# Altium PCB BPQ.PcbDoc (part 1 of 2)
Units mm, origin at the board's own origin, x right, y up, seen from the top; angles counter-clockwise.
Board outline 200.03 x 149.99 mm, 2 copper layers (Top Layer, Bottom Layer); 132 components, 80 nets, 460 pads, 79 vias.
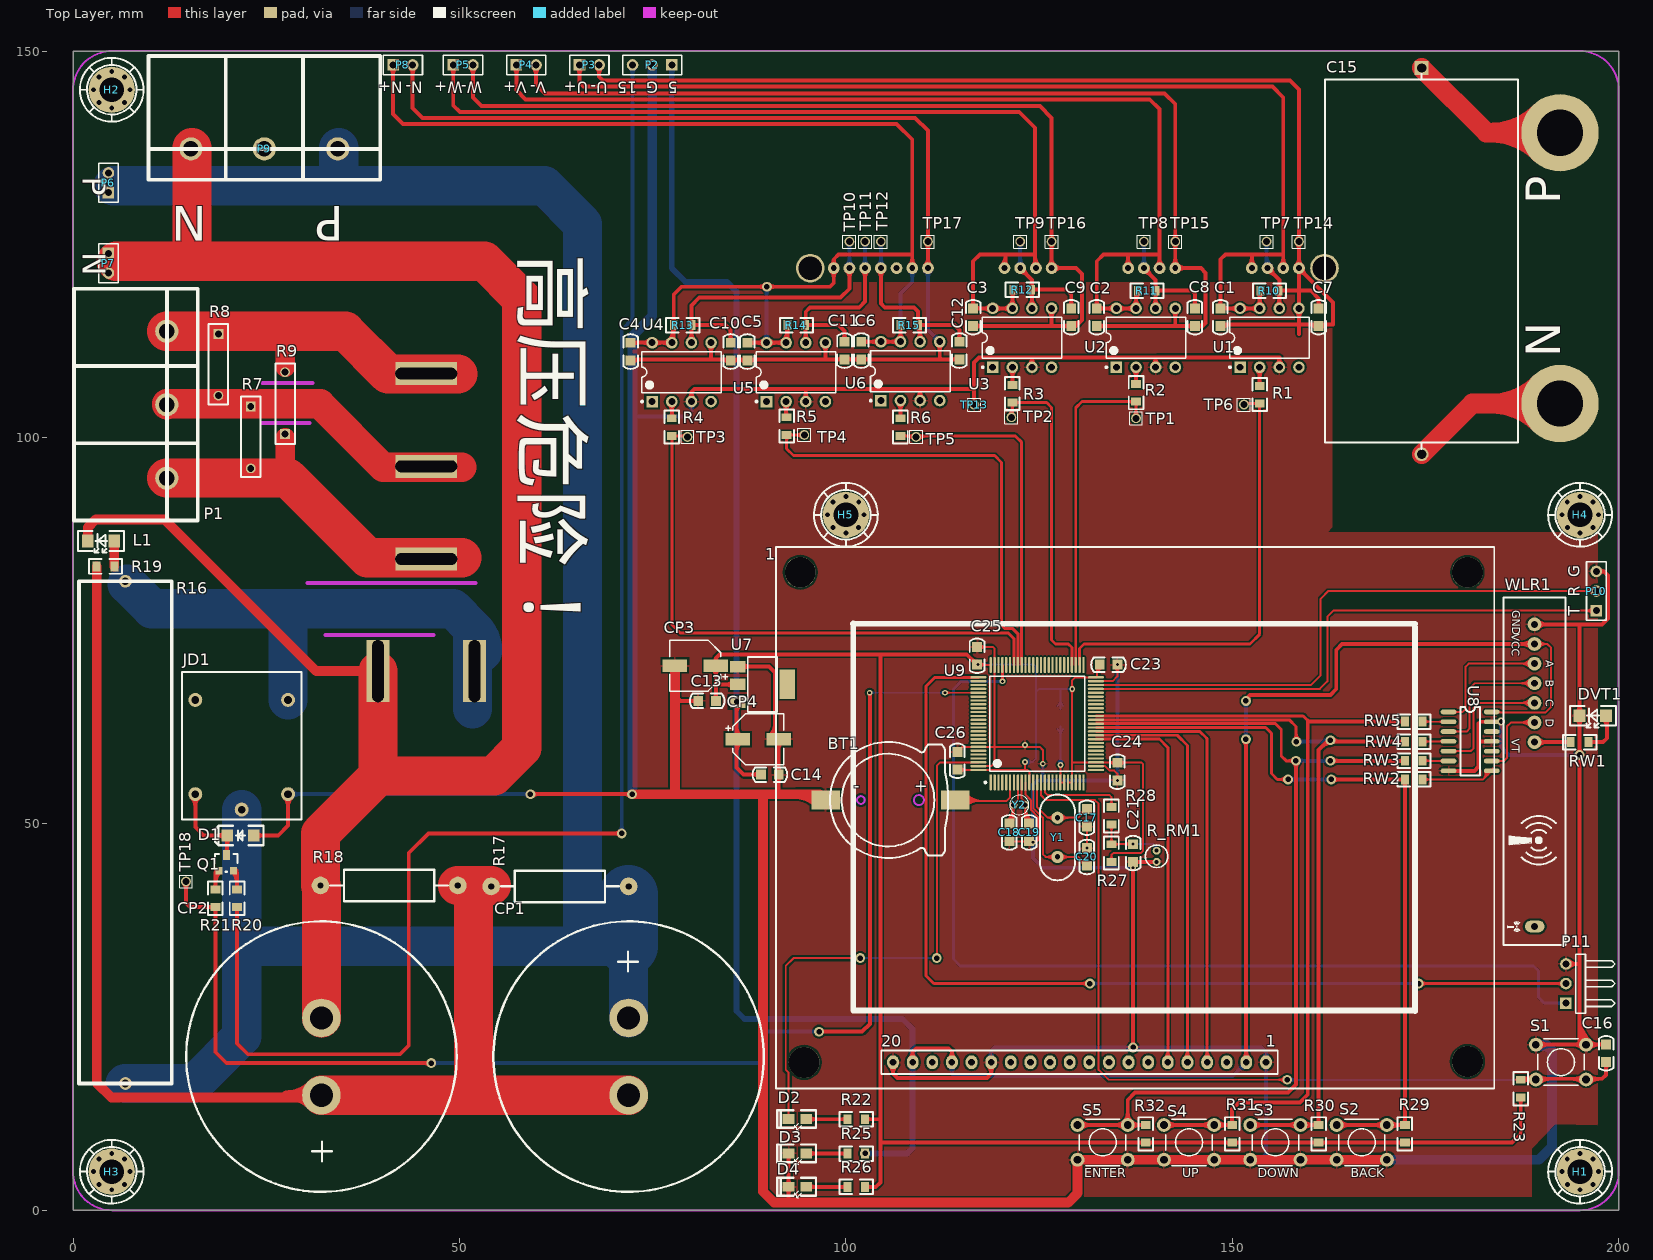
[diagram p0: Top Layer view]
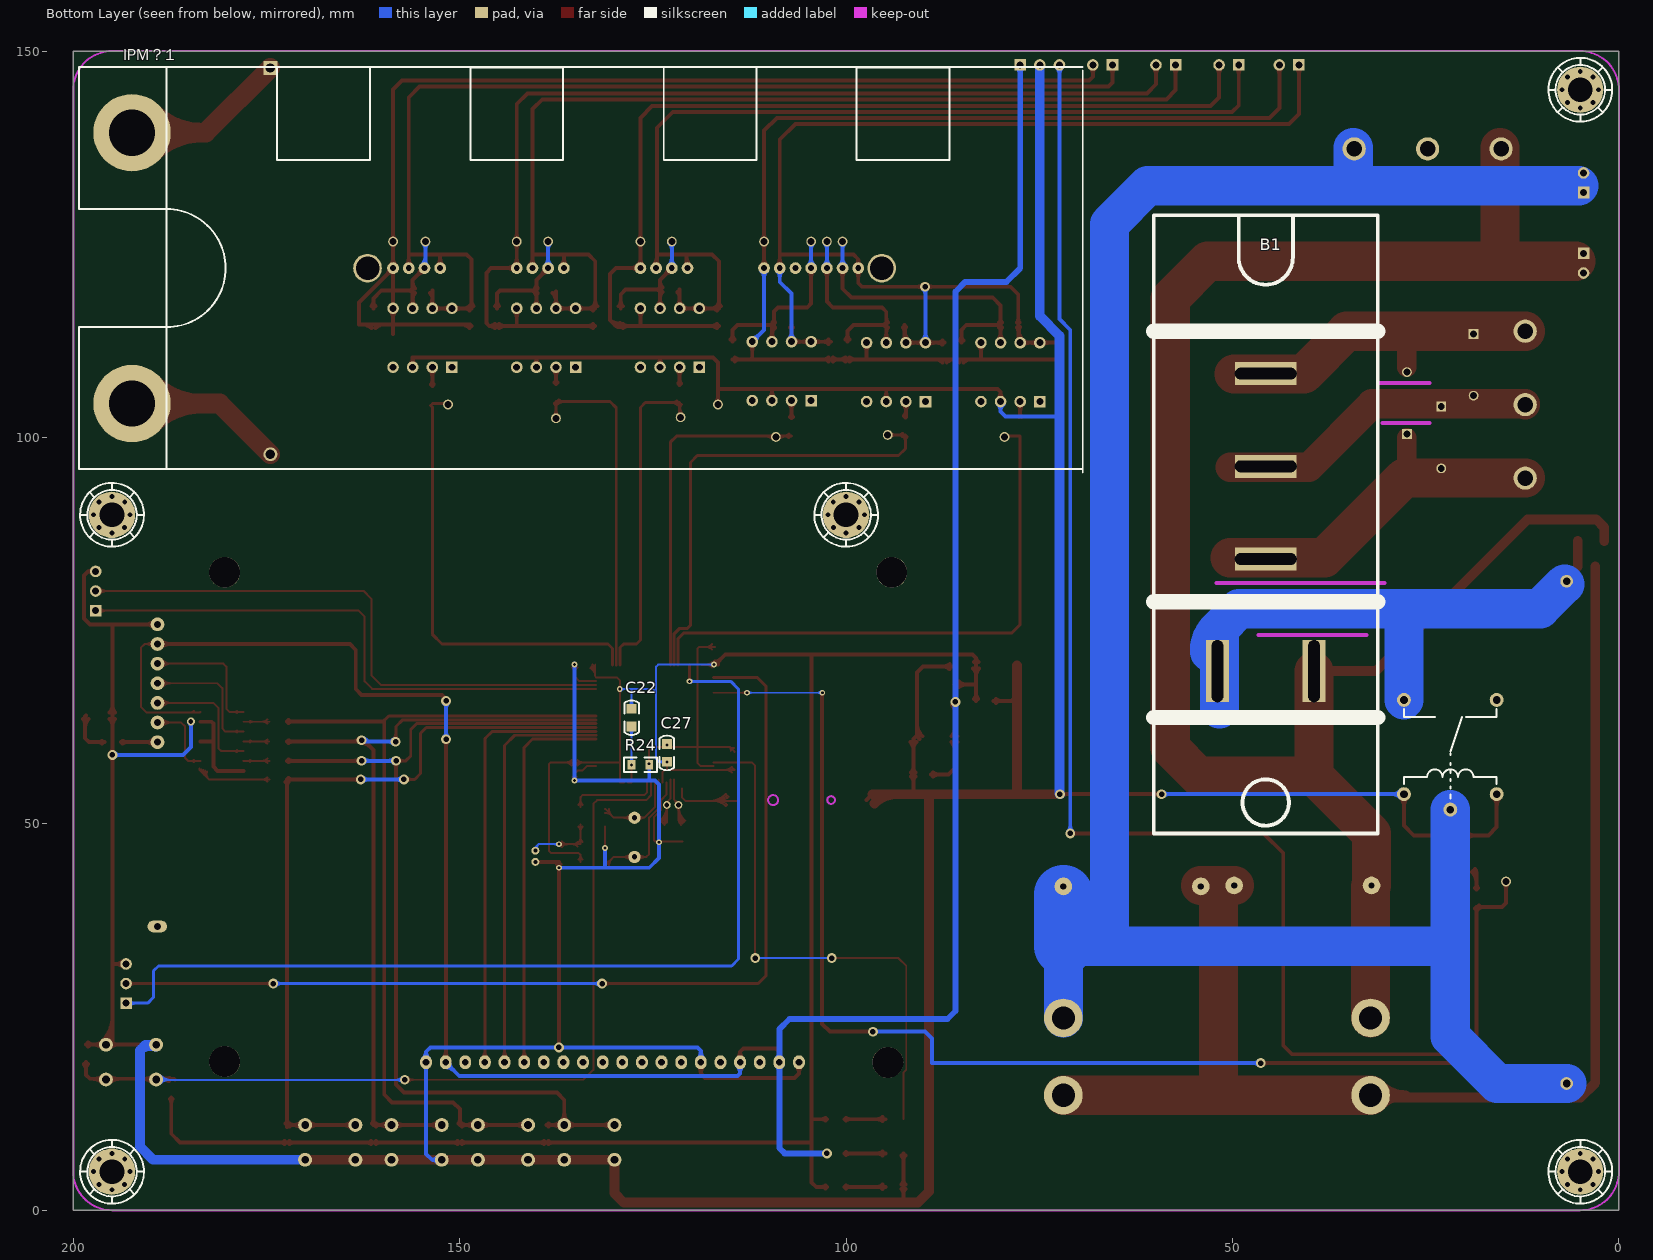
[diagram p1: Bottom Layer view, seen from below]

## Layer stack, top to bottom
Top Layer: signal copper 0.0356
Dielectric: dielectric 0.32, FR-4, Dk 4.8
Bottom Layer: signal copper 0.0356

## Board outline
0,0 200.025,0 200,0.025 200,5.588 200,149.962 200.025,149.987 195.58,149.987 0,149.987

## Design rules (kind name [scope] priority, off if disabled: settings)
Clearance [All] p1: gap=0.254
PolygonConnect [All] p1: connectstyle=Relief reliefconductorwidth=0.254 reliefentries=4 polygonreliefangle="90 Angle" airgapwidth=0.254
RoutingVias [All] p1: holewidth=0.711 width=1.27 viastyle="Through Hole" minholewidth=0.711 minwidth=1.27 maxholewidth=0.711 maxwidth=1.27
SolderMaskExpansion [All] p1: expansion=0.102
Width [All] p1: maxlimit=12.7 minlimit=0.254 preferedwidth=0.508
28 further rules are at their usual default settings.

## Components (designator, comment, footprint, x,y, rotation, side; value= is the part's Value field where it differs from the comment)
1 "12864" YX12864B 90.932,15.748 r0 top
B1 "3BRIDGE" 三相整流桥 60.198,48.768 r180 bottom
BT1 "3.6V" CR1220 114.173,53.086 r180 top
C1 "Cap" 0805C 148.463,114.427 r90 top
C2 "Cap" 0805C 132.461,114.427 r90 top
C3 "Cap" 0805C 116.459,114.427 r90 top
C4 "Cap" 0805C 72.136,109.982 r90 top
C5 "Cap" 0805C 87.249,109.982 r90 top
C6 "Cap" 0805C 101.981,110.109 r90 top
C7 "Cap" 0805C 161.163,114.427 r90 top
C8 "Cap" 0805C 145.161,114.427 r90 top
C9 "Cap" 0805C 129.159,114.427 r90 top
C10 "Cap" 0805C 85.09,109.982 r90 top
C11 "Cap" 0805C 99.822,110.109 r90 top
C12 "Cap" 0805C 114.681,110.109 r90 top
C13 "104" 0805C 80.899,65.913 r0 top
C14 "104" 0805C 91.313,56.388 r180 top
C15 "Cap" Cap_X 174.498,147.828 r270 top
C16 "104" 0805C 198.374,21.463 r270 top
C17 "10p" 0805C 131.191,49.657 r90 top
C18 "10p" 0805C 121.158,47.752 r90 top
C19 "10p" 0805C 123.698,47.752 r90 top
C20 "10p" 0805C 131.191,46.863 r270 top
C21 "104" 0805C 137.16,45.085 r90 top
C22 "104" 0805C 127.762,62.611 r90 bottom
C23 "104" 0805C 132.842,70.612 r0 top
C24 "104" 0805C 135.128,57.912 r270 top
C25 "104" 0805C 116.967,70.612 r90 top
C26 "104" 0805C 114.427,57.023 r90 top
C27 "104" 0805C 123.19,58.039 r90 bottom
CP1 "470uF/450V" CAP_35X50 71.882,24.892 r270 top
CP2 "470uF/450V" CAP_35X50 32.131,14.892 r90 top
CP3 "47uF/25V" CAP_6.3X5.4 80.518,70.485 r180 top
CP4 "10uF" CAP_6.3X5.4 88.646,60.96 r0 top
D1 "1N4148" Diode_1206 23.368,48.514 r0 top
D2 "LED" LED_0805 94.869,11.811 r180 top
D3 "LED" LED_0805 94.869,7.366 r180 top
D4 "LED" LED_0805 94.869,3.048 r180 top
DVT1 "LED" LED_1206 198.374,64.008 r180 top
H1 "铜柱孔" HOLE 195,5 r0 top
H2 "铜柱孔" HOLE 5,145 r0 top
H3 "铜柱孔" HOLE 5,5 r0 top
H4 "铜柱孔" HOLE 195,90 r0 top
H5 "铜柱孔" HOLE 100,90 r0 top (schematic designator H4)
IPM？1 "PM25RLA120" PM25RLA120 158.623,121.92 r180 bottom
JD1 "SRD-12VDC-SL-C" SRD-12VDC-SL-C 27.813,53.848 r90 top
L1 "LED" LED_1206 5.334,86.614 r180 top
P1 "三相电接入口" 30A/300V 0.127,119.253 r270 top
P2 "Header 3" HDR1X3 77.47,148.209 r180 top
P3 "Header 2" HDR1X2 65.532,148.209 r0 top
P4 "Header 2" HDR1X2 57.362,148.209 r0 top
P5 "Header 2" HDR1X2 49.191,148.209 r0 top
P6 "Header 2" HDR1X2 4.572,131.699 r90 top
P7 "Header 2" HDR1X2 4.572,123.825 r270 top
P8 "Header 2" HDR1X2 41.402,148.209 r0 top
P9 "PN输出口" 30A/300V 39.751,149.352 r180 top
P10 "Header 3" HDR1X3 197.104,77.597 r90 top
P11 "SW" HDR1X3H 193.167,26.797 r90 top
Q1 "PNP" SOT23 19.812,44.958 r0 top
R1 "Res2" 0805R 153.543,104.394 r90 top
R2 "Res2" 0805R 137.541,104.648 r90 top
R3 "Res2" 0805R 121.539,104.521 r90 top
R4 "Res2" 0805R 77.47,100.203 r90 top
R5 "Res2" 0805R 92.329,100.33 r90 top
R6 "Res2" 0805R 107.061,100.203 r90 top
R7 "Res Varistor" R_VDR 22.987,104.013 r270 top
R8 "Res Varistor" R_VDR 18.796,113.411 r270 top
R9 "Res Varistor" R_VDR 27.432,100.457 r90 top
R10 "Res2" 0805R 153.67,118.999 r0 top
R11 "Res2" 0805R 137.795,118.999 r0 top
R12 "Res2" 0805R 121.666,119.126 r0 top
R13 "Res2" 0805R 77.724,114.554 r0 top
R14 "Res2" 0805R 92.456,114.554 r0 top
R15 "Res2" 0805R 107.061,114.554 r0 top
R16 "30欧/20W" R_30R/20W 0.762,81.407 r270 top
R17 "150K" AXIAL0.7 62.992,41.91 r0 top
R18 "150K" AXIAL0.7 40.894,42.037 r0 top
R19 "100K" 0805R 5.334,83.312 r180 top
R20 "Res" 0805R 21.209,41.529 r270 top
R21 "Res" 0805R 18.415,41.529 r270 top
R22 "1K" 0805R 102.489,11.786 r180 top
R23 "10K" 0805R 187.325,16.891 r270 top
R24 "0" 0805R 127.762,57.658 r180 bottom
R25 "1K" 0805R 102.489,7.341 r180 top
R26 "1K" 0805R 102.489,3.023 r180 top
R27 "512" 0805R 134.366,45.085 r90 top
R28 "102" 0805R 134.366,52.197 r270 top
R29 "10K" 0805R 172.339,11.049 r270 top
R30 "10K" 0805R 161.163,11.049 r270 top
R31 "10K" 0805R 149.987,11.049 r270 top
R32 "10K" 0805R 138.811,11.049 r270 top
R_RM1 "热敏电阻" R_RM 140.208,45.085 r90 top
RW1 "102" 0805R 193.802,60.579 r0 top
RW2 "202" 0805R 172.339,55.753 r0 top
RW3 "202" 0805R 172.339,58.166 r0 top
RW4 "202" 0805R 172.339,60.642 r0 top
RW5 "202" 0805R 172.339,63.246 r0 top
S1 "KEY" "SW_PB - 6.5x4.5" 192.532,19.177 r0 top
S2 "微动开关" "SW_PB - 6.5x4.5" 166.751,8.788 r180 top
S3 "微动开关" "SW_PB - 6.5x4.5" 155.575,8.788 r180 top
S4 "微动开关" "SW_PB - 6.5x4.5" 144.399,8.788 r180 top
S5 "微动开关" "SW_PB - 6.5x4.5" 133.223,8.788 r180 top
TP1 "TestPoint" TEST-POINT 137.541,102.489 r90 top
TP2 "TestPoint" TEST-POINT 121.412,102.616 r90 top
TP3 "TestPoint" TEST-POINT 79.502,100.076 r90 top
TP4 "TestPoint" TEST-POINT 94.615,100.33 r90 top
TP5 "TestPoint" TEST-POINT 109.093,100.076 r90 top
TP6 "TestPoint" TEST-POINT 151.511,104.267 r0 top
TP7 "TestPoint" TEST-POINT 154.432,125.349 r90 top
TP8 "TestPoint" TEST-POINT 138.557,125.349 r90 top
TP9 "TestPoint" TEST-POINT 122.555,125.349 r90 top
TP10 "TestPoint" TEST-POINT 100.457,125.349 r90 top
TP11 "TestPoint" TEST-POINT 102.489,125.349 r90 top
TP12 "TestPoint" TEST-POINT 104.521,125.349 r90 top
TP13 "TestPoint" TEST-POINT 116.586,104.267 r90 top
TP14 "TestPoint" TEST-POINT 158.623,125.349 r90 top
TP15 "TestPoint" TEST-POINT 142.621,125.349 r90 top
TP16 "TestPoint" TEST-POINT 126.619,125.349 r90 top
TP17 "TestPoint" TEST-POINT 110.617,125.349 r90 top
TP18 "TestPoint" TEST-POINT 14.605,42.545 r90 top
U1 "4504" DIP-8 154.813,112.903 r90 top
U2 "4504" DIP-8 138.811,112.903 r90 top
U3 "4504" DIP-8 122.809,112.903 r90 top
U4 "4504" DIP-8 78.74,108.458 r90 top
U5 "4504" DIP-8 93.535,108.458 r90 top
U6 "4504" DIP-8 108.331,108.585 r90 top
U7 "AMS1117" SOT223 85.979,70.358 r270 top
U8 "CD4069" SO-14 174.371,66.421 r0 top
U9 "STM32F103VET6" LQFP100 118.745,55.372 r90 top
WLR1 "Wireless_Recever" Wireless_Recever 189.103,75.819 r270 top
Y1 "8M" XTAL2 127.381,50.8 r270 top
Y2 "32.768" XTAL1 123.19,52.451 r180 top

## Footprints (in the part's own frame and the unit in brackets; to place one, negate y for a bottom-side part, rotate by r counter-clockwise, add the part's x,y. Pads: shape width x height; smd on the part's side, far side on the other; paste and mask are expansions set on the pad)
30A/300V [mm]
  round 3 hole 2: 1(5.5,12) 2(15,12) 3(24.5,12)
  silkscreen extent 0,0 30,16
0805C [mil]
  rect 50x50 smd: 1(0,0) 2(90,0)
  silkscreen extent -43,-37 133,37
0805R [mil]
  rect 40x50 smd: 1(0,0) 2(90,0)
  silkscreen extent -39,-37 130,37
AXIAL0.7 [mil]
  round 90 hole 32: 1(-350,0) 2(350,0)
  silkscreen extent -300,-80 300,80
CAP_6.3X5.4 [mm] "47u/25V"
  rect 3.15x1.6 smd: 1(-2.65,0) 2(2.65,0)
  silkscreen extent -4.22,-3.3 3.3,3.3
CAP_35X50 [mm] "450V/470uF"
  round 5 hole 3: 1(0,0) 2(10,0)
  silkscreen extent -12.5,-17.5 22.5,17.5
Cap_X [mm] "吸收电容封装，管脚距离50mm"
  rect 1.8x1.8 hole 1.2: 1(0,0)
  round 1.8 hole 1.2: 2(50,0)
  silkscreen extent 0.8,-12.5 49.3,12.5
CR1220 [mm]
  rect 3.7x2.5 smd: 1(0,0) 2(16.799,0)
  Keep-Out Layer circle w0.254: c12.23,0 r0.5
  Keep-Out Layer circle w0.254: c4.73,0 r0.65
  silkscreen extent 0.94,-7.51 16.24,7.51
Diode_1206 [mil]
  rect 60x60 smd: 1(0,0) 2(-135,0)
  silkscreen extent -196,-50 50,50
DIP-8 [mm] "DIP; 8 Leads; Row Spacing 7.62 mm; Pitch 2.54 mm"
  rect 1.5x1.5 hole 0.9: 1(-3.81,3.81)
  round 1.5 hole 0.9: 2(-3.81,1.27) 3(-3.81,-1.27) 4(-3.81,-3.81) 5(3.81,-3.81) 6(3.81,-1.27) 7(3.81,1.27) 8(3.81,3.81)
  silkscreen extent -3.93,-5.15 2.65,5.23, body extent -3.6,-5.15 3.6,5.15, height 5.08
HDR1X2 [mm] "Connector; Header; 2 Position"
  rect 1.5x1.5 hole 0.9: 1(0,0)
  round 1.5 hole 0.9: 2(2.54,0)
  silkscreen extent -1.27,-1.27 3.81,1.27
HDR1X3 [mm] "Connector; Header; 3 Position"
  rect 1.5x1.5 hole 0.9: 1(0,0)
  round 1.5 hole 0.9: 2(2.54,0) 3(5.08,0)
  silkscreen extent -1.27,-1.27 6.35,1.27
HDR1X3H [mm] "Connector; Header; 3 Position; Right Angle"
  rect 1.5x1.5 hole 0.9: 1(0,0)
  round 1.5 hole 0.9: 2(2.54,0) 3(5.08,0)
  silkscreen extent -1.27,-6.35 6.35,-1.27
HOLE [mm] "铜柱孔"
  round 6 hole 3.2: 0(0,0)
  silkscreen extent -4.13,-4.12 4.13,4.12
LED_0805 [mil]
  rect 60x50 smd: 1(0,0) 2(90,0)
  silkscreen extent -50,-45 148,56
LED_1206 [mil]
  rect 60x65 smd: 1(0,0) 2(135,0)
  silkscreen extent -50,-50 185,60
LQFP100 [mm]
  oval 2.1x0.3 smd: 1(0,0) 2(0,-0.5) 3(0,-1) 4(0,-1.5) 5(0,-2) 6(0,-2.5) 7(0,-3) 8(0,-3.5) 9(0,-4) 10(0,-4.5) 11(0,-5) 12(0,-5.5) 13(0,-6) 14(0,-6.5) 15(0,-7) 16(0,-7.5) 17(0,-8) 18(0,-8.5) 19(0,-9) 20(0,-9.5) 21(0,-10) 22(0,-10.5) 23(0,-11) 24(0,-11.5) 25(0,-12) 51(15.2,-12) 52(15.2,-11.5) 53(15.2,-11) 54(15.2,-10.5) 55(15.2,-10) 56(15.2,-9.5) 57(15.2,-9) 58(15.2,-8.5) 59(15.2,-8) 60(15.2,-7.5) 61(15.2,-7) 62(15.2,-6.5) 63(15.2,-6) 64(15.2,-5.5) 65(15.2,-5) 66(15.2,-4.5) 67(15.2,-4) 68(15.2,-3.5) 69(15.2,-3) 70(15.2,-2.5) 71(15.2,-2) 72(15.2,-1.5) 73(15.2,-1) 74(15.2,-0.5) 75(15.2,0)
  oval 0.3x2.1 smd: 26(1.6,-13.6) 27(2.1,-13.6) 28(2.6,-13.6) 29(3.1,-13.6) 30(3.6,-13.6) 31(4.1,-13.6) 32(4.6,-13.6) 33(5.1,-13.6) 34(5.6,-13.6) 35(6.1,-13.6) 36(6.6,-13.6) 37(7.1,-13.6) 38(7.6,-13.6) 39(8.1,-13.6) 40(8.6,-13.6) 41(9.1,-13.6) 42(9.6,-13.6) 43(10.1,-13.6) 44(10.6,-13.6) 45(11.1,-13.6) 46(11.6,-13.6) 47(12.1,-13.6) 48(12.6,-13.6) 49(13.1,-13.6) 50(13.6,-13.6) 76(13.6,1.6) 77(13.1,1.6) 78(12.6,1.6) 79(12.1,1.6) 80(11.6,1.6) 81(11.1,1.6) 82(10.6,1.6) 83(10.1,1.6) 84(9.6,1.6) 85(9.1,1.6) 86(8.6,1.6) 87(8.1,1.6) 88(7.6,1.6) 89(7.1,1.6) 90(6.6,1.6) 91(6.1,1.6) 92(5.6,1.6) 93(5.1,1.6) 94(4.6,1.6) 95(4.1,1.6) 96(3.6,1.6) 97(3.1,1.6) 98(2.6,1.6) 99(2.1,1.6) 100(1.6,1.6)
  silkscreen extent -0.12,-12.15 13.75,0.82
PM25RLA120 [mil] "三菱IPM模块"
  round 60 hole 30: 1(0,0) 2(80,0) 3(160,0) 4(240,0) 5(630,0) 6(710,0) 7(790,0) 8(870,0) 9(1260,0) 10(1340,0) 11(1420,0) 12(1500,0) 13(1890,0) 14(1970,0) 15(2050,0) 16(2130,0) 17(2210,0) 18(2290,0) 19(2370,0)
  round 393.7 hole 236.22: 20(-1330,690) 21(-1330,-690)
  round 145.67 hole 120: A(-130,0) B(2490,0)
  silkscreen extent -1600,-1041 3514,1024
R_30R/20W [mm] "水泥电阻"
  round 1.651 hole 1: 1(0,6) 2(65,6)
  silkscreen extent 0,0 65,12
R_RM [mil]
  round 40 hole 20: 1(0,0) 2(57,0)
  silkscreen extent -29,-57 86,57
R_VDR [mm] "压敏电阻封装，管脚距离8mm"
  rect 1.27x1.27 hole 0.9: 1(0,0)
  round 1.27 hole 0.9: 2(8,0)
  silkscreen extent -1.28,-1.28 9.12,1.26
SO-14 [mil]
  oval 80x24 smd: 1(142,-76) 2(142,-126) 3(142,-176) 4(142,-226) 5(142,-276) 6(142,-326) 7(142,-376) 8(362,-376) 9(362,-326) 10(362,-276) 11(362,-226) 12(362,-176) 13(362,-126) 14(362,-76)
  silkscreen extent 202,-401 302,-51
SOT23 [mil]
  rect 36x36 smd: B(-37.5,-40) E(37.5,-40)
  rect 36x50 smd: C(0.5,40)
  silkscreen extent -57,-45 58,45
SOT223 [mil]
  rect 59x79 smd: 1(0,0) 2(90.55,0) 3(181.1,0)
  rect 150x79 smd: ""(89.88,253.54)
  silkscreen extent -49,52 231,202
SRD-12VDC-SL-C [mm]
  round 1.8 hole 1: 1(0,0) 2(0,12) 3(-2,6) 4(12.2,0) 6(12.2,12)
  silkscreen extent -3.3,-1.75 15.8,13.75
"SW_PB - 6.5x4.5" [mm]
  round 1.8 hole 1: 1(-3.25,-2.25) 1(3.25,-2.25) 2(-3.25,2.25) 2(3.25,2.25)
  silkscreen extent -3,-3 3,3
TEST-POINT [mm]
  round 1.27 hole 0.9: 0(0,0)
  silkscreen extent -0.84,-0.84 0.84,0.84
Wireless_Recever [mil] "433无线遥控接收端"
  round 70 hole 35.43: 1(0,0) 2(100,0) 3(200,0) 4(300,0) 5(400,0) 6(500,0) 7(600,0)
  oval 60x100 hole 35.43: 8(1539,1)
  silkscreen extent -138,-157 1634,157
XTAL1 [mm]
  round 1 hole 0.6: 1(0,0) 2(1.5,0)
  silkscreen extent -0.5,-1.25 2,1.25
XTAL2 [mil]
  round 62 hole 28: 1(0,0) 2(200,0)
  silkscreen extent -119,-89 319,89
YX12864B [mm]
  round 4 hole 4: 0(3.156,66.812) 0(3.664,3.396) 0(89.488,3.496) 0(89.488,66.812)
  oval 1.524x1.8 hole 0.86: 1(63.426,3.412) 2(60.886,3.412) 3(58.346,3.412) 4(55.806,3.412) 5(53.266,3.412) 6(50.726,3.412) 7(48.186,3.412) 8(45.646,3.412) 9(43.106,3.412) 10(40.566,3.412) 11(38.026,3.412) 12(35.486,3.412) 13(32.946,3.412) 14(30.406,3.412) 15(27.866,3.412) 16(25.326,3.412) 17(22.786,3.412) 18(20.246,3.412) 19(17.706,3.412) 20(15.166,3.412)
  silkscreen extent 0,0 92.96,70.1
三相整流桥 [mm] "6RI130G-160   30A/1600V"
  rect 3x8 hole 1.5 slot 8 at 90 deg: 1(8.25,21) 2(20.75,21)
  rect 8x3 hole 1.5 slot 8 at 0 deg: 3(14.5,35.5) 4(14.5,47.5) 5(14.5,59.5)
  silkscreen extent 0,0 29,80

## Part data
B1: library part 三相整流桥
BT1: library part BATTERY, "3.6V纽扣电池"
C1 C2 C3 C4 C5 C6 C7 C8 C9 C10 C11 C12: "Capacitor"
C13 C14 C17 C18 C19 C20 C21: library part Cap, "非极性电容"
C15: "非极性电容"
C16 C22 C23 C24 C25 C26 C27: library part Cap, "Capacitor"
CP1 CP2 CP3 CP4: library part Cap_Pol, "极性电容"
D1: library part DIODE2
IPM？1: "三菱IPM模块25A 1200V"
JD1: "松乐 10A    12V继电器"
L1: "发光二极管"
P1 P9: library part "Header 3", "Header, 3-Pin"
P2 P10: "Header, 3-Pin"
P3 P4 P5 P6 P7 P8: "Header, 2-Pin"
P11: library part "Header 3H", "Header, 3-Pin, Right Angle"
Q1: "PNP Transistor"
R1 R2 R3 R4 R5 R6 R10 R11 R12 R13 R14 R15: "Resistor"
R7 R8 R9: "Varistor (Voltage-Sensitive Resistor)"
R16 R17 R18 R19 R27 R28: library part Res, "电阻"
R20 R21: "电阻"
R22 R23 R24 R25 R26 R29 R30 R31 R32: library part Res2, "Resistor"
R_RM1: library part Res_Temperature
RW1 RW2 RW3 RW4 RW5: library part RES2
U7: "三端稳压器件"
WLR1: "Connector"
Y1 Y2: library part XTAL, "Crystal Oscillator"

## Via types
v1: diameter 0.635, hole 0.635, Top Layer to Bottom Layer, 40 vias
v2: diameter 1.27, hole 0.711, Top Layer to Bottom Layer, 23 vias
v3: diameter 0.762, hole 0.381, Top Layer to Bottom Layer, 15 vias
v4: diameter 1.016, hole 0.61, Top Layer to Bottom Layer, 1 vias

## Nets (pads, with @x,y where several pads share a name; then routed paths per layer and width w, separated by ;. In a path a pad name is that pad's centre, name@x,y a point inside that pad or via, vN(x,y) a via of type N, cw(c..) or ccw(c..) an arc to the next point about the centre after c; other vN are vias at no path point)
3.3V: C13.2 C22.2 C23.1 C24.1 C25.1 C26.1 C27.1 CP3.1 R22.1 R23.2 R26.1 R27.1 R29.2 R30.2 R31.2 R32.2 U7.2 U9.11 U9.21 U9.22 U9.28 U9.50 U9.75 U9.100 | length 334.4
  Top Layer w0.254: C26.1@114.427,57.023 114.478,56.972 U9.100@117.145,56.972 123.495,56.972 123.745,56.722 U9.11@123.745,55.372 ; C26.1@114.607,57.203 ccw(c115.163,57.759) 115.163,56.972 ; C26.1@114.786,56.664 cw(c115.53,55.92) 115.53,56.972 ; C26.1@114.786,57.382 ccw(c115.777,58.373) 115.777,56.972 ; C25.1@116.967,70.612 117.007,70.572 U9.75@118.745,70.572 ; C25.1@117.147,70.792 ccw(c117.677,71.322) 117.677,70.572 ; C25.1@117.25,70.432 cw(c117.587,70.095) C25.1@117.587,70.572 ; C25.1@117.25,70.792 ccw(c117.78,71.322) 117.78,70.572 ; C25.1@117.326,70.253 cw(c118.097,69.482) 118.097,70.572 ; C25.1@117.326,70.971 ccw(c118.29,71.935) 118.29,70.572 ; v3@122.993,57.842 cw(c122.56,57.409) 123.173,57.409 cw(c123.786,57.409) v3@123.353,57.842 ; 123.173,57.082 v3(123.173,58.022) ; U9.21@128.745,55.372 U9.22@129.245,55.372 129.245,57.912 ; v3@129.106,67.257 cw(c128.772,66.923) 129.245,66.923 ; v3@129.106,67.617 ccw(c128.772,67.951) 129.245,67.951 ; 129.245,66.725 cw(c129.998,66.725) v3@129.466,67.257 ; 129.245,68.149 ccw(c129.998,68.149) v3@129.466,67.617 ; U9.50@132.345,68.972 129.678,68.972 129.245,68.539 129.245,57.912 ; U9.50@132.461,69.071 cw(c133.733,69.071) C23.1@133.096,70.172 ; U9.50@132.461,69.119 C23.1@132.461,70.612 ; 132.461,69.511 cw(c133.478,69.511) C23.1@132.969,70.392 ; 132.461,69.952 cw(c133.224,69.952) C23.1@132.842,70.612 ; 133.757,57.972 cw(c133.757,56.541) C24.1@134.769,57.553 ; 134.046,57.972 ccw(c134.046,58.994) C24.1@134.769,58.271 ; R27.1@134.103,45.361 ccw(c133.519,45.974) 134.366,45.974 ; R27.1@134.366,45.085 134.366,45.974 ; 134.37,57.972 cw(c134.37,57.154) C24.1@134.948,57.732 ; R27.1@134.629,45.361 cw(c135.213,45.974) 134.366,45.974 ; C24.1@135.308,57.732 cw(c135.886,57.154) 135.886,57.972 ; C24.1@135.487,57.553 cw(c136.499,56.541) 136.499,57.972 ; C24.1@135.487,58.271 ccw(c136.21,58.994) 136.21,57.972 ; 129.245,57.912 129.305,57.972 U9.28@132.345,57.972 138.243,57.972 138.43,57.785 138.43,46.482 138.176,46.228 134.62,46.228 134.366,45.974
  Top Layer w0.508: CP3.1@82.782,70.099 cw(c81.85,69.167) 83.168,69.167 cw(c84.486,69.167) CP3.1@83.554,70.099 ; CP3.1@82.873,70.945 ccw(c82.527,71.484) 83.168,71.484 ; C13.2@82.916,66.182 ccw(c82.306,66.792) 83.168,66.792 ; 83.168,66.874 ccw(c84.146,66.874) C13.2@83.454,66.182 ; C13.2@83.185,65.913 83.168,65.93 83.168,68.199 ; CP3.1@83.463,70.945 cw(c83.809,71.484) 83.168,71.484 ; U7.2@85.375,67.708 ccw(c84.529,66.862) 84.529,68.058 ccw(c84.529,69.254) U7.2@85.375,68.408 ; U7.2@85.979,68.058 83.309,68.058 83.168,68.199 ; R26.1@102.489,3.023 103.861,3.023 104.457,3.619 104.457,8.763 ; R22.1@102.489,11.786 104.394,11.786 ; R26.1@102.669,2.843 cw(c103.102,2.409) 103.102,3.023 cw(c103.102,3.636) R26.1@102.669,3.202 ; R22.1@102.669,11.606 cw(c103.102,11.172) 103.102,11.786 cw(c103.102,12.399) R22.1@102.669,11.965 ; 104.457,71.882 104.457,8.763 ; C25.1@116.396,71.146 cw(c116.196,70.4) C25.1@116.947,70.582 ; C25.1@116.586,70.612 ccw(c115.666,70.612) 116.317,71.262 ccw(c116.967,71.913) C25.1@116.967,70.993 ; C25.1@116.677,70.902 ccw(c117.07,71.294) C25.1@117.07,70.739 ; C25.1@116.967,70.612 115.633,71.945 83.629,71.945 83.168,71.484 ; R32.2@138.504,8.583 ccw(c138.071,8.15) 138.071,8.763 ccw(c138.071,9.376) R32.2@138.504,8.943 ; R32.2@139.118,8.583 cw(c139.551,8.15) 139.551,8.763 cw(c139.551,9.376) R32.2@139.118,8.943 ; R31.2@149.68,8.583 ccw(c149.247,8.15) 149.247,8.763 ccw(c149.247,9.376) R31.2@149.68,8.943 ; R31.2@150.294,8.583 cw(c150.727,8.15) 150.727,8.763 cw(c150.727,9.376) R31.2@150.294,8.943 ; R30.2@160.856,8.583 ccw(c160.423,8.15) 160.423,8.763 ccw(c160.423,9.376) R30.2@160.856,8.943 ; R30.2@161.47,8.583 cw(c161.903,8.15) 161.903,8.763 cw(c161.903,9.376) R30.2@161.47,8.943 ; R29.2@172.032,8.583 ccw(c171.599,8.15) 171.599,8.763 ccw(c171.599,9.376) R29.2@172.032,8.943 ; R29.2@172.646,8.583 cw(c173.079,8.15) 173.079,8.763 cw(c173.079,9.376) R29.2@172.646,8.943 ; R23.2@187.145,14.425 cw(c186.712,13.992) 187.325,13.992 cw(c187.938,13.992) R23.2@187.505,14.425 ; R23.2@187.325,14.605 187.325,9.906 186.182,8.763 R29.2@172.339,8.763 R30.2@161.163,8.763 R31.2@149.987,8.763 R32.2@138.811,8.763 104.457,8.763 ; 83.168,68.199 CP3.1@83.168,70.485 83.168,71.484
  Bottom Layer w0.254: v3@117.094,70.612 124.333,70.612 124.587,70.358 124.587,67.056 ; v3@117.25,70.432 cw(c117.683,69.999) 117.683,70.612 cw(c117.683,71.225) v3@117.25,70.792 ; v3(123.173,58.022) 124.189,58.022 ; C27.1@123.353,57.842 cw(c123.786,57.409) 123.786,58.022 cw(c123.786,58.635) C27.1@123.353,58.202 ; C27.1@123.592,57.729 cw(c124.189,57.268) 124.189,58.022 ; C27.1@123.608,58.327 ccw(c124.189,58.727) 124.189,58.022 ; C22.2@127.403,65.256 ccw(c126.536,66.123) 127.762,66.123 ccw(c128.988,66.123) C22.2@128.121,65.256 ; C22.2@127.762,64.897 127.762,67.437 ; v3@129.106,67.257 ccw(c128.673,66.824) 128.673,67.437 ccw(c128.673,68.05) v3@129.106,67.617 ; v3(129.286,67.437) 124.968,67.437 124.587,67.056 ; 124.189,58.022 124.587,58.42 124.587,67.056
  other v3: 117.07,70.612
5V: 1.2 1.17 1.19 C14.2 CP4.1 P2.1 R25.1 U7.3 U8.14 WLR1.2 | length 378.3
  Top Layer w0.254: U8.14@183.566,64.491 183.667,64.389 190.5,64.389 191.262,65.151 191.262,72.771 190.754,73.279 ; U8.14@184.403,64.616 ccw(c184.952,65.165) 184.952,64.389 ; WLR1.2@189.103,73.279 190.754,73.279 ; WLR1.2@189.49,72.949 cw(c190.204,72.341) 190.204,73.279 cw(c190.204,74.217) WLR1.2@189.49,73.609 ; WLR1.2@189.683,72.785 cw(c190.754,71.872) 190.754,73.279 ; WLR1.2@189.683,73.773 ccw(c190.754,74.686) 190.754,73.279
  Top Layer w0.508: U7.3@85.583,65.517 cw(c84.932,64.866) 85.852,64.866 cw(c86.772,64.866) U7.3@86.121,65.517 ; CP4.1@85.61,60.574 cw(c85.025,59.989) 85.852,59.989 ; CP4.1@85.61,61.346 ccw(c85.025,61.931) 85.852,61.931 ; U7.3@85.629,65.408 cw(c85.09,64.869) 85.852,64.869 ; 85.852,59.294 cw(c87.662,59.294) CP4.1@86.382,60.574 ; 85.852,62.626 ccw(c87.662,62.626) CP4.1@86.382,61.346 ; 85.852,64.256 cw(c87.481,64.256) U7.3@86.329,65.408 ; v2(85.852,65.786) 85.852,57.277 86.741,56.388 C14.2@89.027,56.388 ; C14.2@88.758,56.119 ccw(c88.107,55.468) 88.107,56.388 ccw(c88.107,57.308) C14.2@88.758,56.657 ; 1.19@108.284,19.662 ccw(c107.469,20.5) 108.638,20.5 ; 1.19@108.638,19.16 108.638,20.5 ; 1.19@108.992,19.662 cw(c109.807,20.5) 108.638,20.5 ; 1.17@113.36,19.658 ccw(c112.5,20.521) 113.718,20.521 ; 1.17@113.718,19.16 113.718,20.521 ; 1.17@114.077,19.658 cw(c114.936,20.521) 113.718,20.521 ; 1.2@151.459,19.657 ccw(c150.72,20.396) 151.765,20.396 ; v2@151.496,60.691 cw(c150.845,60.04) 151.765,60.04 cw(c152.685,60.04) v2@152.034,60.691 ; 151.765,20.653 ccw(c153.173,20.653) 1.2@152.177,19.657 ; v2(151.765,60.96) 151.765,19.213 1.2@151.818,19.16 ; v2@151.765,66.167 152.273,66.675 ; v2@152.125,66.037 cw(c152.71,66.238) 152.273,66.675 ; WLR1.2@188.654,72.83 ccw(c187.57,71.746) 187.57,73.279 ccw(c187.57,74.812) WLR1.2@188.654,73.728 ; WLR1.2@189.103,73.279 164.211,73.279 163.449,72.517 163.449,67.437 162.687,66.675 152.273,66.675 ; 108.638,20.5 109.093,20.955 113.284,20.955 113.718,20.521
  Bottom Layer w0.508: 1.17@113.359,18.663 cw(c112.492,17.795) 113.718,17.795 cw(c114.945,17.795) 1.17@114.077,18.663 ; 1.17@113.718,19.16 113.718,17.727 114.046,17.399 150.057,17.399 1.2@151.818,19.16 ; 150.715,18.057 cw(c151.818,16.954) 1.2@151.818,18.514 ; 151.049,18.39 ccw(c150.417,19.022) 1.2@151.31,19.022 ; v2@151.496,61.229 ccw(c150.845,61.88) 151.765,61.88 ccw(c152.685,61.88) v2@152.034,61.229 ; v2@151.496,65.644 cw(c150.845,64.993) 151.765,64.993 cw(c152.685,64.993) v2@152.034,65.644 ; v2(151.765,60.96) v2(151.765,65.913)
  Bottom Layer w0.762: P2.1@77.209,147.948 cw(c76.579,147.318) 77.47,147.318 cw(c78.361,147.318) P2.1@77.731,147.948 ; P2.1@77.47,148.336 77.47,121.92 79.248,120.142 84.582,120.142 85.852,118.872 v2(85.852,65.786) 85.852,25.781 86.868,24.765 107.315,24.765 108.638,23.442 1.19@108.638,19.16 108.638,8.054 107.95,7.366 v2(102.489,7.366) ; 1.19@108.369,18.752 cw(c107.718,18.102) 108.638,18.102 cw(c109.558,18.102) 1.19@108.908,18.752 ; 1.19@108.369,19.567 ccw(c107.718,20.218) 108.638,20.218 ccw(c109.558,20.218) 1.19@108.908,19.567
+15V: P2.3 R20.2 | length 200.2
  Top Layer w0.508: R20.2@21.029,39.063 cw(c20.596,38.63) 21.209,38.63 cw(c21.822,38.63) R20.2@21.389,39.063 ; R20.2@21.209,39.243 21.209,21.59 22.606,20.193 42.291,20.193 43.434,21.336 43.434,46.228 45.974,48.768 v2(70.993,48.768) ; v2@70.724,48.499 ccw(c70.073,47.848) 70.073,48.768 ccw(c70.073,49.688) v2@70.724,49.037
  Bottom Layer w0.508: v2@70.724,49.037 ccw(c70.073,49.688) 70.993,49.688 ccw(c71.913,49.688) v2@71.262,49.037 ; v2(70.993,48.768) 70.993,113.919 72.39,115.316 P2.3@72.39,148.209 ; P2.3@72.039,147.858 cw(c71.193,147.012) 72.39,147.012 cw(c73.587,147.012) P2.3@72.741,147.858
AGND: C22.1 R24.1 U9.19 U9.20 | length 13
  Top Layer w0.254: v3@127.565,57.461 cw(c127.132,57.028) 127.745,57.028 cw(c128.358,57.028) v3@127.925,57.461 ; v3(127.745,57.641) U9.19@127.745,55.372 U9.20@128.245,55.372
  Bottom Layer w0.254: C22.1@127.403,62.252 cw(c126.536,61.385) 127.762,61.385 cw(c128.988,61.385) C22.1@128.121,62.252 ; R24.1@127.493,58.054 ccw(c126.842,58.705) 127.762,58.705 ccw(c128.682,58.705) R24.1@128.031,58.054 ; R24.1@127.565,57.821 ccw(c127.091,58.295) 127.762,58.295 ; R24.1@127.762,57.658 C22.1@127.762,62.611 ; R24.1@127.762,58.213 ccw(c128.317,58.213) R24.1@127.925,57.821
EINT: U9.1
GND: 1.1 1.15 1.20 BT1.2 C13.1 C14.1 C16.1 C17.1 C18.1 C19.1 C20.1 C21.1 C23.2 C24.2 C25.2 C26.2 C27.2 CP3.2 CP4.2 D1.1 D3.2 D4.2 DVT1.2 JD1.1 P2.2 P10.3 P11.3 R24.2 R_RM1.1 S1.2 S2.2 S3.2 S4.2 S5.2 TP13.0 U1.3 U2.3 U3.3 U4.3 U5.3 U6.3 U7.1 U8.7 U8.11 U8.13 U9.10 U9.27 U9.49 U9.74 U9.94 U9.99 WLR1.1 | length 909.2
  Top Layer w0.254: C26.2@114.427,59.309 115.09,59.972 ; C26.2@114.532,59.806 ccw(c114.658,60.404) 115.09,59.972 ; C26.2@114.924,59.414 cw(c115.522,59.54) 115.09,59.972 ; C25.2@116.967,72.898 118.999,72.898 119.245,72.652 U9.74@119.245,70.572 119.245,59.972 ; U9.99@117.145,57.472 118.813,57.472 119.245,57.904 119.245,59.972 ; C25.2@117.326,72.539 cw(c118.193,71.672) 118.193,72.898 cw(c118.193,74.124) C25.2@117.326,73.257 ; C18.1@121.158,47.752 C19.1@123.698,47.752 124.714,47.752 124.841,47.879 124.841,50.927 123.952,51.816 123.952,53.086 123.245,53.793 U9.10@123.245,55.372 ; v3(125.476,57.785) 125.476,59.563 125.067,59.972 119.245,59.972 ; v3(131.191,46.863) C17.1@131.191,49.657 ; U9.27@132.345,57.472 133.536,57.472 134.112,56.896 134.747,56.896 135.128,56.515 ; U9.49@132.345,68.472 134.512,68.472 135.128,69.088 v3(135.128,70.612) ; C23.2@134.769,70.253 cw(c133.902,69.386) 135.128,69.386 cw(c136.354,69.386) C23.2@135.487,70.253 ; C24.2@134.87,56.064 ccw(c134.604,56.515) 135.128,56.515 ; C24.2@134.948,55.806 ccw(c134.515,56.239) 135.128,56.239 ccw(c135.741,56.239) C24.2@135.308,55.806 ; C23.2@134.948,70.432 cw(c134.515,69.999) 135.128,69.999 cw(c135.741,69.999) C23.2@135.308,70.432 ; v3(135.128,55.626) 135.128,56.515 ; C24.2@135.386,56.064 cw(c135.652,56.515) 135.128,56.515 ; 115.09,59.972 U9.94@117.145,59.972 119.245,59.972
  Top Layer w0.508: D1.1@23.368,48.514 26.543,48.514 27.813,49.784 JD1.1@27.813,53.848 ; D1.1@23.727,48.155 cw(c24.594,47.288) 24.594,48.514 cw(c24.594,49.74) D1.1@23.727,48.873 ; JD1.1@27.356,53.391 cw(c26.253,52.288) 27.813,52.288 cw(c29.373,52.288) JD1.1@28.27,53.391 ; v2(59.182,53.848) v2@72.136,53.848 ; v2@59.451,53.579 cw(c60.102,52.928) 60.102,53.848 cw(c60.102,54.768) v2@59.451,54.117 ; v2@72.057,53.579 ccw(c71.407,52.928) 71.407,53.848 ccw(c71.407,54.768) v2@72.057,54.117 ; 78.232,66.294 78.613,65.913 C13.1@80.899,65.913 ; U4.3@79.659,104.999 ccw(c78.813,105.845) 80.01,105.845 ccw(c81.207,105.845) U4.3@80.361,104.999 ; U4.3@80.01,104.648 80.01,105.918 80.391,106.299 94.996,106.299 ; C13.1@80.63,65.644 ccw(c79.979,64.993) 79.979,65.913 ccw(c79.979,66.833) C13.1@80.63,66.182 ; U7.1@85.979,70.358 90.043,70.358 90.805,69.596 90.805,61.451 CP4.2@91.296,60.96 91.296,53.992 91.44,53.848 ; U7.1@86.583,70.008 cw(c87.429,69.162) 87.429,70.358 cw(c87.429,71.554) U7.1@86.583,70.708 ; 89.281,53.594 89.281,53.848 ; CP4.2@90.135,61.346 ccw(c88.517,62.964) 90.805,62.964 ; CP4.2@90.494,60.987 ccw(c89.744,61.737) CP4.2@90.805,61.737 ; CP4.2@90.91,60.574 cw(c89.978,59.642) 91.296,59.642 cw(c92.614,59.642) CP4.2@91.682,60.574 ; C14.1@91.044,56.119 cw(c90.434,55.509) 91.296,55.509 ; C14.1@91.044,56.657 ccw(c90.434,57.267) 91.296,57.267 ; 91.296,55.427 cw(c92.274,55.427) C14.1@91.582,56.119 ; 91.296,57.349 ccw(c92.274,57.349) C14.1@91.582,56.657 ; D4.2@92.314,2.779 cw(c91.663,2.128) 92.583,2.128 cw(c93.503,2.128) D4.2@92.852,2.779 ; D4.2@92.314,3.317 ccw(c91.663,3.968) 92.583,3.968 ccw(c93.503,3.968) D4.2@92.852,3.317 ; D3.2@92.314,7.097 cw(c91.663,6.446) 92.583,6.446 cw(c93.503,6.446) D3.2@92.852,7.097 ; 92.583,1.016 D4.2@92.583,3.048 D3.2@92.583,7.366 ; U5.3@94.455,104.999 ccw(c93.608,105.845) 94.805,105.845 ccw(c96.003,105.845) U5.3@95.156,104.999 ; U5.3@94.805,104.648 94.805,106.108 94.996,106.299 ; BT1.2@96.612,53.848 BT1.2@97.374,53.086 ; 1.20@105.739,18.663 cw(c104.872,17.795) 106.098,17.795 cw(c107.325,17.795) 1.20@106.457,18.663 ; 1.20@106.098,19.16 106.098,17.727 106.68,17.145 118.237,17.145 118.798,17.706 1.15@118.798,19.16 ; U6.3@109.25,105.126 ccw(c108.404,105.972) 109.601,105.972 ccw(c110.798,105.972) U6.3@109.952,105.126 ; U6.3@109.601,104.775 109.601,106.172 ; TP13.0@116.317,104.536 ccw(c115.666,105.187) 116.586,105.187 ccw(c117.506,105.187) TP13.0@116.855,104.536 ; TP13.0@116.586,104.267 116.586,106.299 ; 1.15@118.439,18.663 cw(c117.572,17.795) 118.798,17.795 cw(c120.025,17.795) 1.15@119.157,18.663 ; U3.3@123.743,109.458 ccw(c123.038,110.224) 124.079,110.224 ccw(c125.12,110.224) U3.3@124.415,109.458 ; U3.3@124.079,109.093 124.079,110.224 123.952,110.351 ; v2(137.16,21.082) v3(137.16,44.323) ; U2.3@139.742,109.455 ccw(c139.012,110.236) 140.081,110.236 ; U2.3@140.081,109.093 140.081,110.236 ; R_RM1.1@140.208,45.085 C21.1@137.16,45.085 v3(137.16,44.323) ; U2.3@140.42,109.455 cw(c141.15,110.236) 140.081,110.236 ; U1.3@155.732,109.444 ccw(c154.886,110.29) 156.083,110.29 ccw(c157.28,110.29) U1.3@156.434,109.444 ; U1.3@156.083,109.093 156.083,110.363 140.208,110.363 140.081,110.236 ; U8.7@177.978,56.871 181.331,56.871 181.864,57.404 181.864,62.992 182.093,63.221 U8.13@183.566,63.221 ; 181.864,60.681 U8.11@183.566,60.681 ; WLR1.1@189.103,75.819 197.866,75.819 198.628,76.581 198.628,82.169 198.12,82.677 ; S1.2@189.282,21.427 189.318,21.463 194.818,21.463 ; WLR1.1@189.552,75.37 cw(c190.636,74.286) 190.636,75.819 cw(c190.636,77.352) WLR1.1@189.552,76.268 ; S1.2@189.739,20.97 cw(c190.929,19.78) 190.929,21.463 ; S1.2@189.739,21.884 ccw(c190.755,22.9) 190.755,21.463 ; P11.3@193.167,31.877 194.818,31.877 194.945,32.004 ; P11.3@193.645,31.526 cw(c194.491,30.68) 194.491,31.877 cw(c194.491,33.074) P11.3@193.645,32.228 ; 194.135,21.463 cw(c194.135,19.78) S1.2@195.325,20.97 ; 194.309,21.463 ccw(c194.309,22.9) S1.2@195.325,21.884 ; DVT1.2@194.586,63.585 cw(c193.719,62.718) 194.945,62.718 cw(c196.171,62.718) DVT1.2@195.304,63.585 ; DVT1.2@194.586,64.431 ccw(c193.719,65.298) 194.945,65.298 ccw(c196.171,65.298) DVT1.2@195.304,64.431 ; v2@194.676,58.659 cw(c194.025,58.008) 194.945,58.008 cw(c195.865,58.008) v2@195.214,58.659 ; v2@194.676,59.197 ccw(c194.025,59.848) 194.945,59.848 ccw(c195.865,59.848) v2@195.214,59.197 ; 194.945,22.554 ccw(c196.909,22.554) S1.2@195.52,21.165 ; 194.945,23.781 ccw(c198.136,23.781) S1.2@195.88,21.525 ; 194.945,25.007 ccw(c199.362,25.007) 196.239,21.884 ccw(c197.255,22.9) 197.255,21.463 ; 194.945,75.819 DVT1.2@194.945,64.008 194.945,32.004 ; S1.2@196.239,20.97 cw(c197.429,19.78) 197.429,21.463 ; P10.3@197.104,82.677 198.12,82.677 ; P10.3@197.495,82.372 cw(c198.12,81.885) 198.12,82.677 ; P10.3@197.495,82.982 ccw(c198.12,83.469) 198.12,82.677 ; C16.1@198.105,21.194 ccw(c197.454,20.543) 197.454,21.463 ccw(c197.454,22.383) C16.1@198.105,21.732 ; C16.1@198.374,21.463 194.818,21.463 ; 94.996,106.299 116.586,106.299 ; 116.586,106.299 116.586,109.728 117.209,110.351 123.952,110.351 ; 123.952,110.351 139.966,110.351 140.081,110.236 ; v3(137.16,44.323) ccw(c136.589,44.323) 136.931,44.78 cw(c136.589,44.323) v3(137.16,44.323) ; v3(137.16,44.323) cw(c137.731,44.323) 137.389,44.78 ccw(c137.731,44.323) v3(137.16,44.323) ; 194.818,21.463 ccw(c194.818,21.884) 195.198,21.704 cw(c194.818,21.884) 194.818,21.463 ; 194.818,21.463 cw(c194.818,21.087) 195.173,21.212 ccw(c194.818,21.087) 194.818,21.463 ; 194.818,21.463 194.945,21.59 194.945,32.004
  Top Layer w1.27: v2(72.326,53.848) 78.232,53.848 ; CP3.2@77.868,70.485 77.868,54.212 78.232,53.848 ; 89.281,53.594 89.281,2.413 90.678,1.016 92.583,1.016 128.778,1.016 129.973,2.211 S5.2@129.973,6.538 S5.2@136.473,6.538 S4.2@141.149,6.538 S4.2@147.649,6.538 S3.2@152.325,6.538 S3.2@158.825,6.538 S2.2@163.501,6.538 S2.2@170.001,6.538 ; 93.45,53.848 cw(c93.45,49.762) BT1.2@96.339,52.651 ; BT1.2@96.612,53.848 91.44,53.848 89.281,53.848 78.232,53.848
  Bottom Layer w0.508: JD1.1@27.813,53.848 v2@58.801,53.848 ; JD1.1@28.27,53.391 cw(c29.373,52.288) 29.373,53.848 cw(c29.373,55.408) JD1.1@28.27,54.305 ; v2@58.913,53.579 ccw(c58.262,52.928) 58.262,53.848 ccw(c58.262,54.768) v2@58.913,54.117 ; 72.39,102.743 79.375,102.743 80.01,103.378 U4.3@80.01,104.648 ; U4.3@79.659,104.297 cw(c78.813,103.451) 80.01,103.451 cw(c81.207,103.451) U4.3@80.361,104.297 ; 1.15@118.439,19.657 ccw(c117.572,20.524) 118.798,20.524 ccw(c120.025,20.524) 1.15@119.157,19.657 ; 1.15@118.798,19.16 118.798,20.627 119.253,21.082 153.797,21.082 154.358,20.521 ; v3(125.476,57.785) R24.2@125.476,57.658 125.476,55.626 ; v3(131.191,46.863) 131.191,44.323 ; v3@135.128,70.739 v3(135.128,55.626) 125.476,55.626 ; v3(137.16,44.323) 131.191,44.323 ; S3.2@152.325,6.538 153.604,6.538 ; S3.2@152.845,6.155 cw(c153.604,5.595) 153.604,6.538 ; S3.2@152.845,6.921 ccw(c153.604,7.481) 153.604,6.538 ; 1.1@154,19.658 ccw(c153.14,20.521) 154.358,20.521 ; 1.1@154.717,19.658 cw(c155.576,20.521) 154.358,20.521 ; v4@184.605,63.066 cw(c184.172,62.633) 184.785,62.633 cw(c185.398,62.633) v4@184.965,63.066 ; v4(184.785,63.246) 184.785,59.944 185.801,58.928 v2(194.945,58.928) ; v2@194.676,58.659 ccw(c194.025,58.008) 194.025,58.928 ccw(c194.025,59.848) v2@194.676,59.197 ; 125.476,55.626 124.714,55.626 124.206,55.118 124.206,45.593 125.476,44.323 131.191,44.323 ; 153.604,6.538 154.358,7.292 1.1@154.358,19.16 154.358,20.521
  Bottom Layer w1.27: v2(72.326,53.848) 72.39,53.911 72.39,102.743 72.39,113.157 74.93,115.697 P2.2@74.93,148.209 ; S2.2@170.001,6.538 189.672,6.538 191.389,8.255 191.389,20.701 ; S1.2@189.282,21.427 190.663,21.427 191.389,20.701 ; S1.2@189.366,21.176 cw(c189.995,19.307) 191.389,20.701
  other v3: 124.206,47.625 123.19,60.198
IPM_BREAK: IPM？1.15
IPM_NGND: C4.1 C5.1 C6.1 C10.1 C11.1 C12.1 IPM？1.13 P8.2 TP17.0 U4.5 U5.5 U6.5 | length 179.4
  Top Layer w0.508: P8.2@43.591,147.858 cw(c42.745,147.012) 43.942,147.012 cw(c45.139,147.012) P8.2@44.293,147.858 ; P8.2@43.942,148.209 43.942,142.621 45.212,141.351 108.966,141.351 110.617,139.7 IPM？1.13@110.617,121.92 ; C4.1@72.136,109.982 72.263,110.109 82.55,110.109 ; C4.1@72.405,109.713 cw(c73.362,108.756) 73.362,110.109 ; U4.5@82.199,111.917 cw(c81.353,111.071) 82.55,111.071 cw(c83.747,111.071) U4.5@82.901,111.917 ; U4.5@82.55,112.268 82.55,110.109 ; 83.864,110.109 cw(c83.864,108.756) C10.1@84.821,109.713 ; C10.1@85.359,109.713 cw(c86.316,108.756) 86.316,110.109 ; 86.023,110.109 cw(c86.023,108.756) C5.1@86.98,109.713 ; C5.1@87.518,109.713 cw(c88.475,108.756) 88.475,110.109 ; U5.5@96.995,111.917 cw(c96.148,111.071) 97.346,111.071 cw(c98.543,111.071) U5.5@97.696,111.917 ; U5.5@97.346,112.268 97.346,110.172 97.409,110.109 ; C11.1@99.553,109.84 ccw(c98.902,109.189) 98.902,110.109 ccw(c98.902,111.029) C11.1@99.553,110.378 ; C11.1@100.091,109.84 cw(c100.742,109.189) 100.742,110.109 cw(c100.742,111.029) C11.1@100.091,110.378 ; C6.1@101.712,109.84 ccw(c101.061,109.189) 101.061,110.109 ccw(c101.061,111.029) C6.1@101.712,110.378 ; C6.1@102.25,109.84 cw(c102.901,109.189) 102.901,110.109 cw(c102.901,111.029) C6.1@102.25,110.378 ; IPM？1.13@110.258,122.279 ccw(c109.391,123.146) 110.617,123.146 ccw(c111.843,123.146) IPM？1.13@110.976,122.279 ; TP17.0@110.348,125.08 cw(c109.697,124.429) 110.617,124.429 cw(c111.537,124.429) TP17.0@110.886,125.08 ; TP17.0@110.348,125.618 ccw(c109.697,126.269) 110.617,126.269 ccw(c111.537,126.269) TP17.0@110.886,125.618 ; U6.5@111.79,112.044 cw(c110.944,111.198) 112.141,111.198 cw(c113.338,111.198) U6.5@112.492,112.044 ; U6.5@112.141,112.395 112.141,110.363 112.395,110.109 ; C12.1@114.412,109.84 ccw(c113.761,109.189) 113.761,110.109 ccw(c113.761,111.029) C12.1@114.412,110.378 ; C12.1@114.681,110.109 112.395,110.109 ; 82.55,110.109 97.409,110.109 ; 97.409,110.109 C11.1@99.822,110.109 C6.1@101.981,110.109 112.395,110.109
  Bottom Layer w0.508: IPM？1.13@110.258,121.561 cw(c109.391,120.694) 110.617,120.694 cw(c111.843,120.694) IPM？1.13@110.976,121.561 ; IPM？1.13@110.617,121.92 110.617,113.919 U6.5@112.141,112.395 ; U6.5@111.645,112.395 ccw(c110.448,112.395) 111.294,113.242 ccw(c112.141,114.088) U6.5@112.141,112.891
IPM_NVCC: C4.2 C5.2 C6.2 IPM？1.14 IPM？1.19 P8.1 R13.1 R14.1 R15.1 U4.7 U4.8 U5.7 U5.8 U6.7 U6.8 | length 219.2
  Top Layer w0.508: P8.1@41.051,147.858 cw(c40.205,147.012) 41.402,147.012 cw(c42.599,147.012) P8.1@41.753,147.858 ; P8.1@41.402,148.209 41.402,141.859 42.672,140.589 106.553,140.589 108.585,138.557 108.585,123.698 ; C4.2@72.136,112.268 U4.8@74.93,112.268 U4.7@77.47,112.268 77.724,112.522 R13.1@77.724,114.554 77.724,118.491 78.74,119.507 v2(89.789,119.507) 97.917,119.507 98.425,120.015 IPM？1.19@98.425,121.92 98.425,123.063 ; C4.2@72.405,111.999 cw(c73.056,111.348) 73.056,112.268 cw(c73.056,113.188) C4.2@72.405,112.537 ; U4.8@74.579,111.917 ccw(c73.733,111.071) 73.733,112.268 ccw(c73.733,113.465) U4.8@74.579,112.619 ; U4.8@75.281,111.917 cw(c76.127,111.071) 76.127,112.268 cw(c76.127,113.465) U4.8@75.281,112.619 ; U4.7@77.119,111.917 ccw(c76.273,111.071) 76.273,112.268 ccw(c76.273,113.465) 77.119,112.619 ccw(c75.659,114.079) R13.1@77.724,114.079 ; R13.1@77.504,114.3 cw(c76.706,113.839) 77.596,113.601 ; R13.1@77.544,114.247 cw(c77.111,113.814) 77.724,113.814 cw(c78.337,113.814) R13.1@77.904,114.247 ; R13.1@77.544,114.861 ccw(c77.111,115.294) 77.724,115.294 ccw(c78.337,115.294) R13.1@77.904,114.861 ; C5.2@87.249,112.268 U5.8@89.725,112.268 U5.7@92.266,112.268 92.456,112.459 R14.1@92.456,114.554 ; C5.2@87.518,111.999 cw(c88.169,111.348) 88.169,112.268 cw(c88.169,113.188) C5.2@87.518,112.537 ; U5.8@89.375,111.917 ccw(c88.528,111.071) 88.528,112.268 ccw(c88.528,113.465) U5.8@89.375,112.619 ; v2@89.52,119.238 ccw(c88.869,118.587) 88.869,119.507 ccw(c88.869,120.427) v2@89.52,119.776 ; v2@90.058,119.238 cw(c90.709,118.587) 90.709,119.507 cw(c90.709,120.427) v2@90.058,119.776 ; U5.8@90.076,111.917 cw(c90.923,111.071) 90.923,112.268 cw(c90.923,113.465) U5.8@90.076,112.619 ; U5.7@91.915,111.917 ccw(c91.068,111.071) 91.068,112.268 ccw(c91.068,113.465) 91.915,112.619 ccw(c90.608,113.925) R14.1@92.456,113.925 ; R14.1@92.236,114.3 cw(c91.321,113.772) 92.342,113.498 ; R14.1@92.276,114.247 cw(c91.843,113.814) 92.456,113.814 cw(c93.069,113.814) R14.1@92.636,114.247 ; 92.456,113.006 ccw(c93.003,113.006) U5.7@92.616,112.619 ; IPM？1.19@98.066,121.561 cw(c97.199,120.694) 98.425,120.694 cw(c99.651,120.694) IPM？1.19@98.784,121.561 ; IPM？1.19@98.085,122.297 ccw(c97.393,123.063) 98.425,123.063 ; IPM？1.19@98.765,122.297 cw(c99.457,123.063) 98.425,123.063 ; C6.2@101.981,112.395 U6.8@104.521,112.395 U6.7@107.061,112.395 R15.1@107.061,114.554 ; C6.2@102.25,112.126 cw(c102.901,111.475) 102.901,112.395 cw(c102.901,113.315) C6.2@102.25,112.664 ; U6.8@104.17,112.044 ccw(c103.324,111.198) 103.324,112.395 ccw(c103.324,113.592) U6.8@104.17,112.746 ; U6.8@104.872,112.044 cw(c105.718,111.198) 105.718,112.395 cw(c105.718,113.592) U6.8@104.872,112.746 ; U6.7@106.71,112.044 ccw(c105.864,111.198) 105.864,112.395 ccw(c105.864,113.592) 106.71,112.746 ccw(c105.864,113.592) 107.061,113.592 ccw(c108.258,113.592) U6.7@107.412,112.746 ; R15.1@106.881,114.247 cw(c106.448,113.814) 107.061,113.814 cw(c107.674,113.814) R15.1@107.241,114.247 ; IPM？1.14@108.226,122.279 ccw(c107.359,123.146) 108.585,123.146 ccw(c109.811,123.146) IPM？1.14@108.944,122.279 ; IPM？1.14@108.585,121.92 108.585,123.698 ; 98.425,123.063 99.06,123.698 108.585,123.698
  Bottom Layer w0.508: U5.8@89.375,112.619 ccw(c88.528,113.465) 89.725,113.465 ccw(c90.923,113.465) U5.8@90.076,112.619 ; v2@89.52,119.238 cw(c89.022,118.74) 89.725,118.74 ; U5.8@89.725,112.268 v2@89.725,119.189 ; 89.725,118.434 cw(c90.862,118.434) v2@90.058,119.238 ; U6.7@106.71,112.746 ccw(c105.864,113.592) 107.061,113.592 ccw(c108.258,113.592) U6.7@107.412,112.746 ; U6.7@107.061,112.395 107.061,118.618 108.585,120.142 IPM？1.14@108.585,121.92 ; IPM？1.14@108.226,121.561 cw(c107.359,120.694) 108.585,120.694 cw(c109.811,120.694) IPM？1.14@108.944,121.561
IPM_UGND: C1.1 C7.1 IPM？1.1 P3.2 TP14.0 U1.5 | length 164.7
  Top Layer w0.508: P3.2@67.721,147.858 cw(c66.875,147.012) 68.072,147.012 cw(c69.269,147.012) P3.2@68.423,147.858 ; P3.2@68.072,148.209 68.072,146.685 68.58,146.177 157.48,146.177 158.623,145.034 158.623,113.411 ; C1.1@148.463,114.427 148.684,114.648 158.623,114.648 ; C1.1@148.732,114.158 cw(c149.917,112.973) 149.917,114.648 ; IPM？1.1@158.264,122.279 ccw(c157.397,123.146) 158.623,123.146 ccw(c159.849,123.146) IPM？1.1@158.982,122.279 ; U1.5@158.272,116.362 cw(c157.426,115.516) 158.623,115.516 cw(c159.82,115.516) U1.5@158.974,116.362 ; TP14.0@158.354,125.08 cw(c157.703,124.429) 158.623,124.429 cw(c159.543,124.429) TP14.0@158.892,125.08 ; TP14.0@158.354,125.618 ccw(c157.703,126.269) 158.623,126.269 ccw(c159.543,126.269) TP14.0@158.892,125.618 ; U1.5@158.623,116.713 158.623,114.648 ; IPM？1.1@158.623,121.412 cw(c158.623,120.265) 159.434,121.076 ; IPM？1.1@158.623,121.92 158.623,121.887 163.035,117.475 163.035,114.648 158.623,114.648 ; IPM？1.1@159.131,121.92 ccw(c160.436,121.92) 159.513,120.997 ; 159.709,114.648 cw(c159.709,112.973) C7.1@160.894,114.158 ; C7.1@161.432,114.158 cw(c162.617,112.973) 162.617,114.648
IPM_UN: C12.2 IPM？1.16 R15.2 TP12.0 U6.6 | length 36.1
  Top Layer w0.508: IPM？1.16@104.162,121.561 cw(c103.295,120.694) 104.521,120.694 cw(c105.747,120.694) IPM？1.16@104.88,121.561 ; IPM？1.16@104.521,121.92 104.521,117.348 105.029,116.84 108.839,116.84 109.347,116.332 R15.2@109.347,114.554 ; R15.2@109.167,114.247 cw(c108.121,113.201) 109.601,113.201 ; R15.2@109.167,114.861 ccw(c108.734,115.294) 109.347,115.294 ccw(c109.96,115.294) R15.2@109.527,114.861 ; U6.6@109.25,112.746 ccw(c108.404,113.592) 109.601,113.592 ccw(c110.798,113.592) U6.6@109.952,112.746 ; R15.2@109.527,114.374 cw(c109.96,113.941) 109.96,114.554 cw(c109.96,115.167) R15.2@109.527,114.734 ; U6.6@109.601,112.395 109.601,114.3 R15.2@109.347,114.554 ; C12.2@114.412,112.664 ccw(c113.761,113.315) 114.681,113.315 ccw(c115.601,113.315) C12.2@114.95,112.664 ; C12.2@114.681,112.395 114.681,113.919 114.046,114.554 R15.2@109.347,114.554
  Bottom Layer w0.508: IPM？1.16@104.162,122.279 ccw(c103.295,123.146) 104.521,123.146 ccw(c105.747,123.146) IPM？1.16@104.88,122.279 ; TP12.0@104.252,125.08 cw(c103.601,124.429) 104.521,124.429 cw(c105.441,124.429) TP12.0@104.79,125.08 ; IPM？1.16@104.521,121.92 TP12.0@104.521,125.349
IPM_UP: C7.2 IPM？1.3 R10.2 TP7.0 U1.6 | length 27.1
  Top Layer w0.508: IPM？1.3@154.559,121.412 cw(c154.559,120.186) 155.426,121.053 cw(c156.293,121.92) IPM？1.3@155.067,121.92 ; IPM？1.3@154.559,121.92 156.083,120.396 R10.2@156.083,118.999 ; U1.6@155.732,117.064 ccw(c154.886,117.91) 156.083,117.91 ccw(c157.28,117.91) U1.6@156.434,117.064 ; R10.2@155.776,118.692 cw(c155.036,117.952) 156.083,117.952 ; R10.2@155.776,119.306 ccw(c155.036,120.046) 156.083,120.046 ; U1.6@156.083,116.713 R10.2@156.083,118.999 ; R10.2@156.136,118.819 cw(c156.569,118.386) 156.569,118.999 cw(c156.569,119.612) R10.2@156.136,119.179 ; C7.2@160.894,116.982 ccw(c160.243,117.633) 161.163,117.633 ccw(c162.083,117.633) C7.2@161.432,116.982 ; C7.2@161.163,116.713 161.163,117.983 160.147,118.999 R10.2@156.083,118.999
  Bottom Layer w0.508: TP7.0@154.163,125.08 cw(c153.512,124.429) 154.432,124.429 cw(c155.352,124.429) TP7.0@154.701,125.08 ; IPM？1.3@154.2,122.279 ccw(c153.639,122.84) 154.432,122.84 ; IPM？1.3@154.432,122.047 TP7.0@154.432,125.349 ; 154.432,123.453 ccw(c156.092,123.453) IPM？1.3@154.918,122.279
IPM_UVCC: C1.2 IPM？1.2 IPM？1.4 P3.1 R10.1 U1.7 U1.8 | length 157
  Top Layer w0.508: P3.1@65.181,147.858 cw(c64.335,147.012) 65.532,147.012 cw(c66.729,147.012) P3.1@65.883,147.858 ; P3.1@65.532,148.209 65.532,145.923 66.04,145.415 155.194,145.415 156.591,144.018 156.591,123.698 ; C1.2@148.194,116.982 ccw(c147.543,117.633) 148.463,117.633 ccw(c149.383,117.633) 148.732,116.982 ccw(c149.383,117.633) 149.383,116.713 ccw(c149.383,115.793) C1.2@148.732,116.444 ; U1.8@150.652,116.362 ccw(c149.806,115.516) 149.806,116.713 ccw(c149.806,117.91) U1.8@150.652,117.064 ; U1.8@151.354,116.362 cw(c152.2,115.516) 152.2,116.713 cw(c152.2,117.91) U1.8@151.354,117.064 ; IPM？1.4@152.168,122.279 ccw(c151.301,123.146) 152.527,123.146 ccw(c153.753,123.146) IPM？1.4@152.886,122.279 ; IPM？1.4@152.527,121.92 152.527,123.571 ; U1.7@153.192,116.362 ccw(c152.346,115.516) 152.346,116.713 ccw(c152.346,117.91) 153.192,117.064 ccw(c152.346,117.91) 153.543,117.91 ccw(c154.74,117.91) U1.7@153.894,117.064 ; 153.543,117.952 cw(c154.59,117.952) R10.1@153.85,118.692 ; R10.1@153.543,118.999 U1.7@153.543,116.713 U1.8@151.003,116.713 C1.2@148.463,116.713 148.463,123.063 149.098,123.698 156.591,123.698 ; IPM？1.2@156.232,122.279 ccw(c155.365,123.146) 156.591,123.146 ccw(c157.817,123.146) IPM？1.2@156.95,122.279 ; IPM？1.2@156.591,121.92 156.591,123.698